# Altium PCB 20K Control Board V1.1.PcbDoc (part 13 of 24)
Units mm, origin at the board's own origin, x right, y up, seen from the top; angles counter-clockwise.
Board outline 132 x 260 mm, 4 copper layers (Top Layer, GND, VCC, Bottom Layer); 1384 components, 779 nets, 4515 pads, 1774 vias.
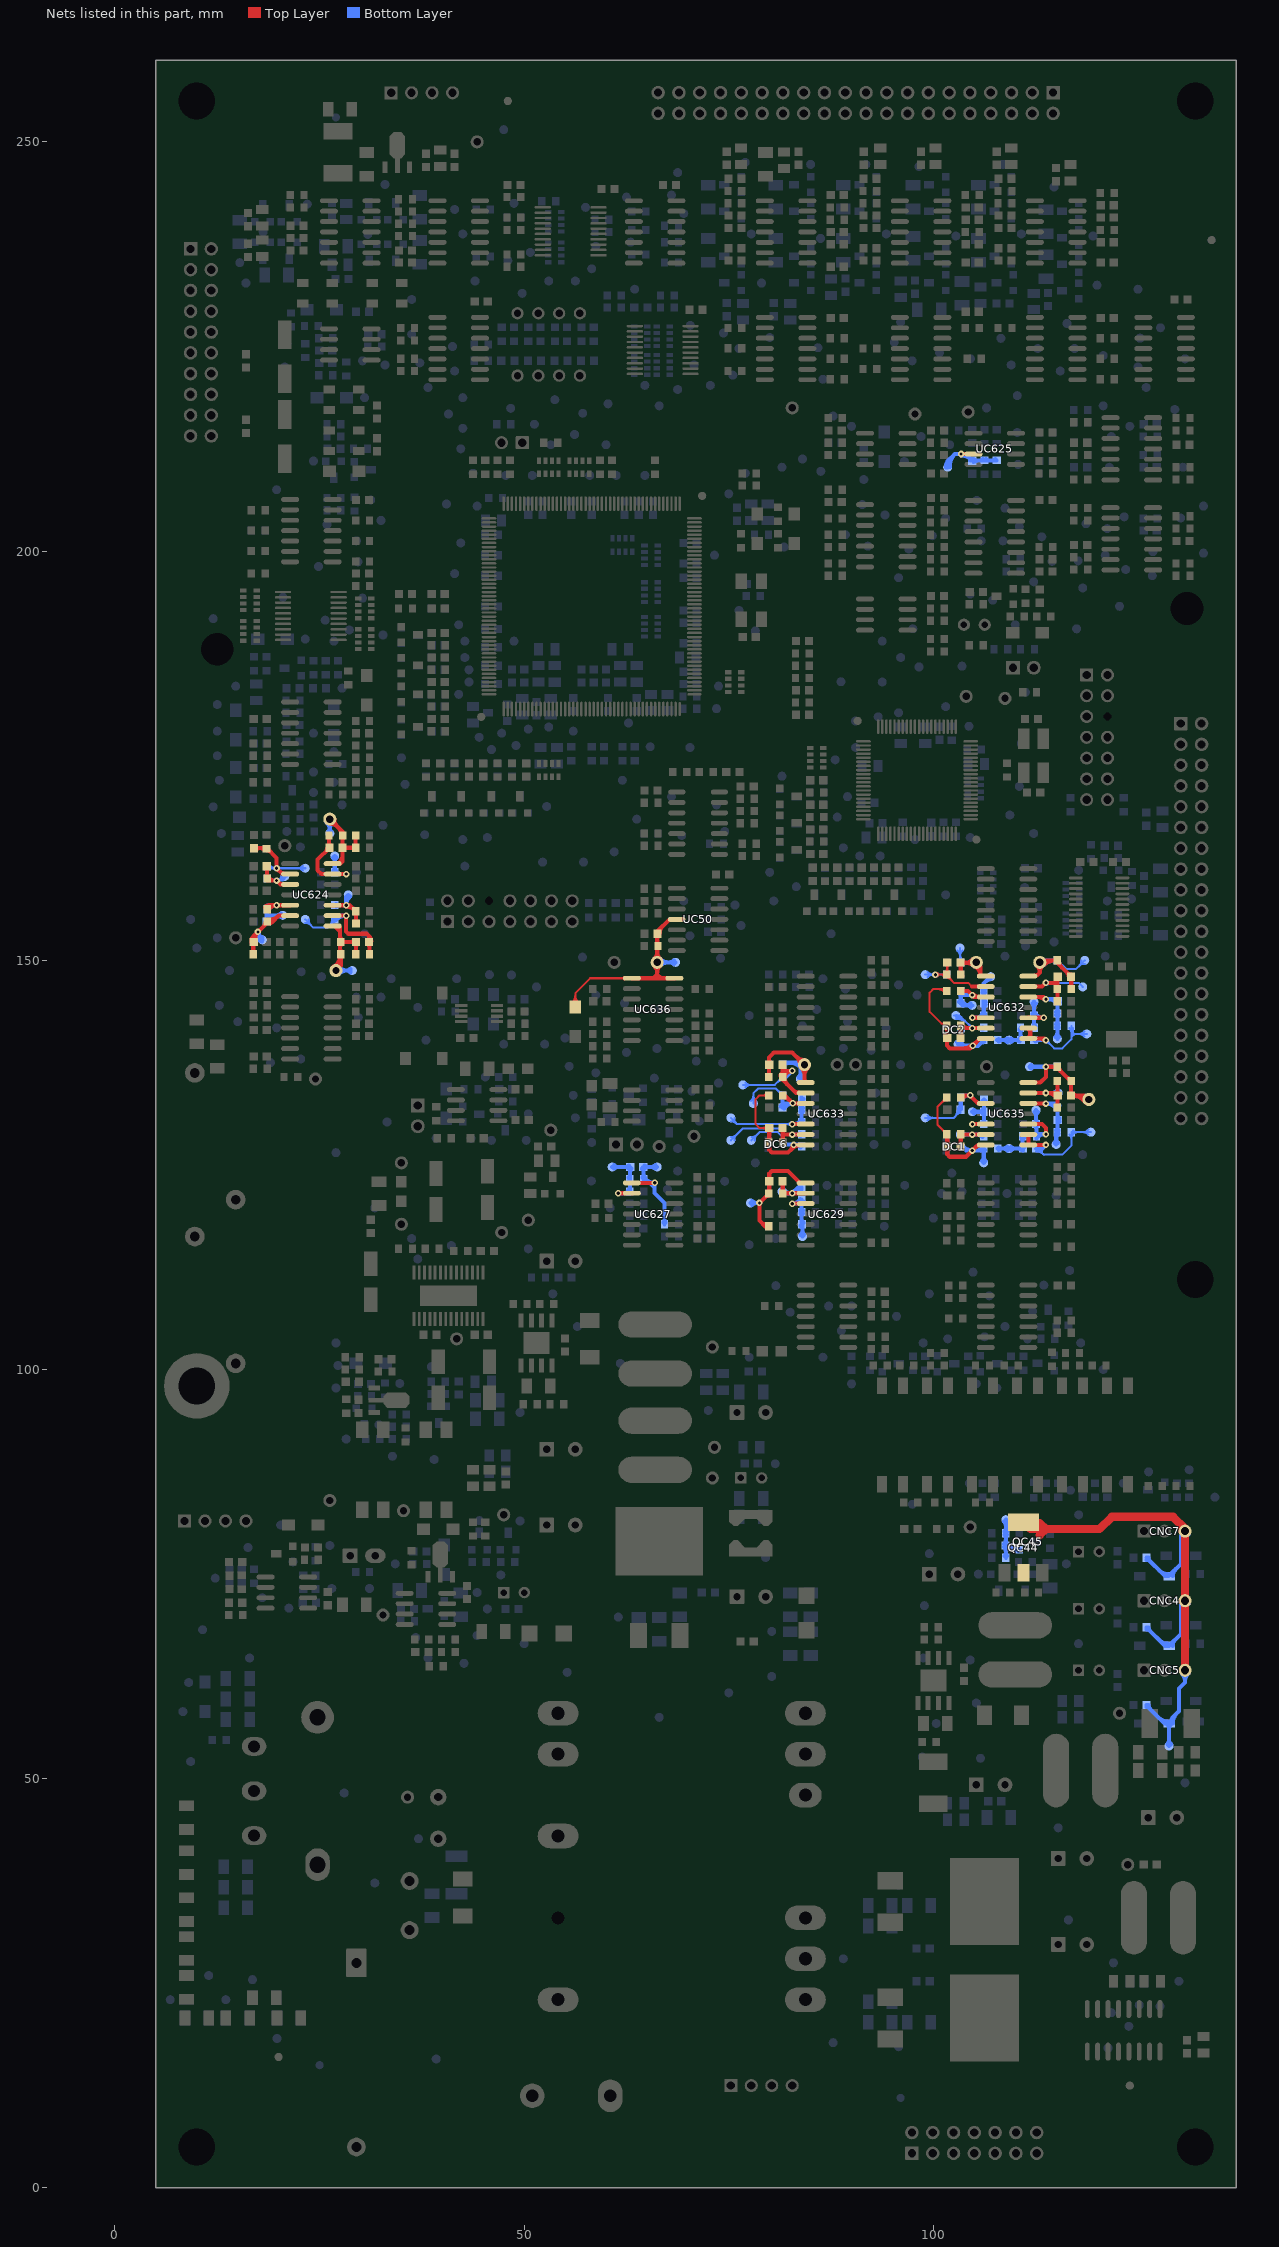
[diagram p15: the nets of this part, all layers, seen from the top]

## Via types
v1: diameter 0.8, hole 0.4, Top Layer to Bottom Layer, tented both sides, 1354 vias
v2: diameter 1.2, hole 0.7, Top Layer to Bottom Layer, 261 vias
v3: diameter 0.8, hole 0.4, Top Layer to Bottom Layer, 58 vias
v4: diameter 1.2, hole 0.7, Top Layer to Bottom Layer, tented top, 58 vias
v5: diameter 0.8, hole 0.4, Top Layer to Bottom Layer, tented top, 22 vias
v6: diameter 1.2, hole 0.7, Top Layer to Bottom Layer, tented both sides, 13 vias
v7: diameter 1.2, hole 0.7, Top Layer to Bottom Layer, tented bottom, 8 vias

## Nets (pads, with @x,y where several pads share a name; then routed paths per layer and width w, separated by ;. In a path a pad name is that pad's centre, name@x,y a point inside that pad or via, vN(x,y) a via of type N, cw(c..) or ccw(c..) an arc to the next point about the centre after c; other vN are vias at no path point) (continued)
NetCC4_1: CC4.1 pad.ICT@103.25,151.5 RC12.1 RC18.2 TP4.1 UC632.1 | length 24.1
  Top Layer w0.5: CC4.1@103.123,149.573 cw(c102.576,149.026) 103.35,149.026 ; RC12.1@103.209,148.441 ccw(c102.867,148.783) 103.35,148.783 ccw(c103.833,148.783) RC12.1@103.491,148.441 ; CC4.1@103.477,149.927 ccw(c104.024,150.474) 104.024,149.7 ; RC12.1@103.54,148.06 RC12.1@103.35,148.25 103.35,149.7 105.2,149.7 TP4.1@105.25,149.75 105.75,149.25 UC632.1@105.75,148.25 ; 103.801,149.7 ccw(c103.801,151.199) TP4.1@104.861,150.139 ; 104.043,149.7 cw(c104.043,148.543) TP4.1@104.861,149.361 ; TP4.1@105.037,149.243 cw(c104.585,148.169) UC632.1@105.75,148.169 ; TP4.1@105.231,149.704 cw(c104.901,148.922) 105.75,148.922 ; UC632.1@105.565,148.095 ccw(c105.117,148.543) 105.75,148.543
  Bottom Layer w0.25: pad.ICT@102.949,151.199 cw(c102.224,150.474) 103.25,150.474 cw(c104.276,150.474) pad.ICT@103.551,151.199 ; RC18.2@103.12,150.03 ccw(c102.807,150.343) 103.25,150.343 ; RC18.2@103.25,149.85 pad.ICT@103.25,151.5 ; 103.25,150.826 ccw(c104.376,150.826) RC18.2@103.58,150.03 ; RC18.2@103.35,149.75 TP4.1@105.25,149.75 ; RC18.2@103.58,149.52 cw(c104.135,148.965) 104.135,149.75 cw(c104.135,150.535) RC18.2@103.58,149.98 ; TP4.1@104.773,149.273 ccw(c103.62,148.12) 103.62,149.75 ccw(c103.62,151.38) TP4.1@104.773,150.227 ; TP4.1@104.949,149.449 ccw(c104.224,148.724) 104.224,149.75 ccw(c104.224,150.776) TP4.1@104.949,150.051
NetCC4_2: CC4.2 pad.ICT@99,148.25 RC12.2 RC13.2 UC632.2 | length 22.1
  Top Layer w0.25: v1(100.25,148.25) RC12.2@101.65,148.25 ; v1@100.444,148.056 cw(c100.914,147.586) 100.914,148.25 cw(c100.914,148.914) v1@100.444,148.444 ; RC12.2@101.42,148.02 ccw(c100.865,147.465) 100.865,148.25 ccw(c100.865,149.035) RC12.2@101.42,148.48 ; RC12.2@101.42,148.53 ccw(c100.745,149.205) 101.7,149.205 ; CC4.2@101.435,149.485 cw(c100.795,148.845) 101.7,148.845 cw(c102.605,148.845) CC4.2@101.965,149.485 ; RC12.2@101.65,147.875 cw(c101.65,147.332) 102.034,147.716 ; 101.7,148.964 ccw(c102.314,148.964) RC12.2@101.88,148.53 ; CC4.2@101.7,149.75 101.7,148.05 102.5,147.25 104.25,147.25 104.71,146.79 ; RC12.2@101.975,148.2 ccw(c103.001,148.2) 102.276,147.474
  Top Layer w0.5: 104.71,146.79 UC632.2@106.4,146.79
  Bottom Layer w0.25: pad.ICT@99,148.25 v1(100.25,148.25) RC13.2@101.65,148.25 ; pad.ICT@99.301,147.949 cw(c100.026,147.224) 100.026,148.25 cw(c100.026,149.276) pad.ICT@99.301,148.551 ; v1@100.056,148.056 ccw(c99.586,147.586) 99.586,148.25 ccw(c99.586,148.914) v1@100.056,148.444 ; v1@100.444,148.056 cw(c100.914,147.586) 100.914,148.25 cw(c100.914,148.914) v1@100.444,148.444 ; RC13.2@101.42,148.02 ccw(c100.865,147.465) 100.865,148.25 ccw(c100.865,149.035) RC13.2@101.42,148.48
NetCC5_1: CC5.1 pad.ICT@26.25,165.5 RC4.1 RC11.1 RC20.1 TP2.1 UC624.14 | length 25.5
  Top Layer w0.5: TP2.1@26.25,166.7 cw(c26.25,165.372) 27.189,166.311 cw(c28.128,167.25) TP2.1@26.8,167.25 ; TP2.1@26.25,167.25 27.85,165.65 RC20.1@27.85,165.25 ; UC624.14@26.6,161.81 27.56,161.81 27.8,162.05 CC5.1@27.8,163.75 ; 27.261,166.239 cw(c26.322,165.3) RC20.1@27.65,165.3 ; UC624.14@27.365,161.845 ccw(c26.314,162.896) 27.8,162.896 ; UC624.14@27.4,161.86 ccw(c27.4,162.367) 27.758,162.008 ; CC5.1@27.623,163.573 cw(c27.196,163.146) 27.8,163.146 cw(c28.404,163.146) 27.977,163.573 cw(c28.404,163.146) 28.404,163.75 cw(c28.404,164.354) 27.977,163.927 cw(c28.404,164.354) 27.8,164.354 cw(c27.196,164.354) CC5.1@27.623,163.927 ; 27.8,164.596 cw(c28.454,164.596) RC20.1@27.991,165.059 ; RC20.1@27.8,165.2 CC5.1@27.8,163.75 ; RC11.1@29.259,163.609 ccw(c28.917,163.267) 28.917,163.75 ccw(c28.917,164.233) RC11.1@29.259,163.891 ; RC11.1@29.259,163.941 ccw(c28.917,164.283) 29.4,164.283 ccw(c29.883,164.283) RC11.1@29.541,163.941 ; RC4.1@29.259,165.059 cw(c28.917,164.717) 29.4,164.717 cw(c29.883,164.717) RC4.1@29.541,165.059 ; RC4.1@29.4,165.25 RC11.1@29.4,163.75 CC5.1@27.8,163.75
  Bottom Layer w0.5: TP2.1@25.861,166.861 cw(c24.922,165.922) 26.25,165.922 cw(c27.578,165.922) TP2.1@26.639,166.861 ; pad.ICT@26.038,165.712 ccw(c25.526,166.224) 26.25,166.224 ccw(c26.974,166.224) pad.ICT@26.462,165.712 ; pad.ICT@26.25,165.5 TP2.1@26.25,167.25
NetCC5_2: CC5.2 pad.ICT@26.85,162.75 RC15.1 RC20.2 UC624.13 | length 16.7
  Top Layer w0.5: CC5.2@25.773,163.323 ccw(c25.346,163.75) CC5.2@25.95,163.75 ; CC5.2@25.773,163.323 cw(c26.2,162.896) CC5.2@26.2,163.5 ; RC20.2@26.009,165.059 cw(c25.667,164.717) 26.15,164.717 cw(c26.633,164.717) RC20.2@26.291,165.059 ; CC5.2@26.15,163.8 RC20.2@26.15,165.25 ; 26.15,164.474 ccw(c26.924,164.474) CC5.2@26.377,163.927 ; CC5.2@26.2,163.75 24.75,162.3 24.75,161 25.21,160.54 UC624.13@26.6,160.54 v1(28.25,160.54)
  Bottom Layer w0.5: pad.ICT@26.638,162.538 cw(c26.126,162.026) 26.85,162.026 cw(c27.574,162.026) pad.ICT@27.062,162.538 ; RC15.1@26.709,160.941 ccw(c26.367,161.283) 26.85,161.283 ccw(c27.333,161.283) RC15.1@26.991,160.941 ; RC15.1@26.85,160.75 pad.ICT@26.85,162.75 ; RC15.1@26.991,160.841 ccw(c27.719,161.569) 27.719,160.54 ; RC15.1@27.06,160.54 v1(28.25,160.54)
NetCC6_1: CC6.1 pad.ICT@66.25,124.75 RC8.2 RC21.2 UC627.1 | length 19.2
  Top Layer w0.5: UC627.1@63.15,122.81 v1(65.94,122.81)
  Bottom Layer w0.5: CC6.1@64.373,124.573 cw(c63.826,124.026) 64.6,124.026 ; RC21.2@64.459,123.441 ccw(c64.117,123.783) 64.6,123.783 ccw(c65.083,123.783) RC21.2@64.741,123.441 ; CC6.1@64.55,124.75 pad.ICT@66.25,124.75 ; CC6.1@64.6,124.7 RC21.2@64.6,123.25 65.04,122.81 v1(65.94,122.81) ; CC6.1@64.727,124.573 cw(c65.154,124.146) 65.154,124.75 cw(c65.154,125.354) CC6.1@64.727,124.927 ; RC21.2@64.748,123.335 ccw(c65.94,124.427) v1(65.94,122.81) ; 65.5,122.69 65.94,122.25 ; pad.ICT@66.038,124.538 ccw(c65.526,124.026) 65.526,124.75 ccw(c65.526,125.474) pad.ICT@66.038,124.962 ; RC8.2@67.009,117.941 ccw(c66.667,118.283) 67.15,118.283 ccw(c67.633,118.283) RC8.2@67.291,117.941 ; RC8.2@67.15,117.75 67.15,120.35 65.94,121.56 65.94,122.25 ; 65.94,122.25 v1(65.94,122.81)
NetCC6_2: CC6.2 pad.ICT@60.75,124.75 RC19.2 RC21.1 UC627.2 | length 13.6
  Top Layer w0.5: v1(61.5,121.54) UC627.2@63.15,121.54
  Bottom Layer w0.5: pad.ICT@60.75,124.75 CC6.2@62.95,124.75 RC19.2@62.95,121.8 ; pad.ICT@60.962,124.538 cw(c61.474,124.026) 61.474,124.75 cw(c61.474,125.474) pad.ICT@60.962,124.962 ; v1(61.5,121.54) RC19.2@62.91,121.54 ; 62.031,121.54 ccw(c62.031,122.569) RC19.2@62.759,121.841 ; RC19.2@62.759,121.941 ccw(c62.296,122.404) 62.95,122.404 ; RC21.1@62.759,123.059 cw(c62.296,122.596) 62.95,122.596 ; RC21.1@62.759,123.441 ccw(c62.296,123.904) 62.95,123.904 ; CC6.2@62.773,124.927 cw(c62.346,125.354) 62.346,124.75 cw(c62.346,124.146) 62.773,124.573 cw(c62.346,124.146) 62.95,124.146 cw(c63.554,124.146) CC6.2@63.127,124.573
NetCC7_2: CC7.2 pad.ICT@28.5,158 RC30.1 RC32.1 UC624.10 | length 13.3
  Top Layer w0.5: UC624.10@26.6,156.73 v1(28.25,156.73) 28.67,156.73 RC30.1@29.4,156 29.45,155.95 CC7.2@29.45,154.5 ; v1@28.25,156.58 cw(c28.25,155.204) RC30.1@29.223,156.177 ; v1@28.323,156.599 cw(c28.549,156.189) 28.88,156.52 ; RC30.1@28.973,156.427 ccw(c29.4,156.854) RC30.1@29.4,156.25 ; RC30.1@29.259,155.809 cw(c28.796,155.346) 29.45,155.346 ; CC7.2@29.273,154.677 ccw(c28.846,155.104) 29.45,155.104 ccw(c30.054,155.104) CC7.2@29.627,154.677
  Bottom Layer w0.5: RC32.1@26.85,156.75 v1@28.23,156.75 ; RC32.1@26.991,156.609 cw(c27.333,156.267) 27.333,156.75 cw(c27.333,157.233) RC32.1@26.991,156.891 ; 27.84,156.75 cw(c27.84,156.32) v1@28.144,156.624 ; v1@28.25,156.706 cw(c29.748,156.706) pad.ICT@28.708,157.784 ; v1(28.25,156.73) 28.25,157.75 pad.ICT@28.5,158
NetCC10_1: CC10.1 pad.ICT@99,130.75 RC17.2 RC25.1 UC635.3 | length 17.8
  Top Layer w0.5: RC17.2@103.491,133.159 cw(c104.316,132.334) v1@104.316,133.5 ; RC17.2@103.6,133.5 v1(104.5,133.5) 105.48,132.52 UC635.3@106.4,132.52 ; 105.31,132.69 ccw(c105.6,132.98) UC635.3@105.6,132.57
  Bottom Layer w0.25: pad.ICT@99,130.75 102.5,130.75 103.3,131.55 CC10.1@103.3,131.75 ; pad.ICT@99.301,130.449 cw(c100.026,129.724) 100.026,130.75 cw(c100.026,131.776) pad.ICT@99.301,131.051 ; 102.6,130.85 ccw(c101.806,131.644) CC10.1@102.926,131.723 ; 102.987,131.237 ccw(c102.529,131.695) CC10.1@103.175,131.741 ; CC10.1@103.001,131.251 cw(c103.3,130.953) CC10.1@103.3,131.375
  Bottom Layer w0.5: CC10.1@103.123,131.927 ccw(c102.576,132.474) 103.35,132.474 ; RC25.1@103.209,133.059 cw(c102.867,132.717) 103.35,132.717 cw(c103.833,132.717) RC25.1@103.491,133.059 ; CC10.1@103.35,131.8 103.35,133.15 RC25.1@103.5,133 ; RC25.1@103.35,133.25 103.6,133.5 v1(104.5,133.5) ; RC25.1@103.491,133.159 cw(c104.316,132.334) v1@104.316,133.5
NetCC11_1: CC11.1 DC1.3 pad.ICT@106.15,125.25 RC17.1 RC35.1 RC58.2 UC635.7 | length 27.6
  Top Layer w0.25: 101.01,129.39 ccw(c101.65,130.03) RC35.1@101.65,129.125 ; 101.01,132.61 cw(c101.65,131.97) RC17.1@101.65,132.875 ; 101.131,129.269 cw(c100.661,128.8) RC35.1@101.325,128.8 ; 101.131,132.731 ccw(c100.661,133.2) RC17.1@101.325,133.2 ; RC17.1@101.5,133.25 RC17.1@101.65,133.25 100.5,132.1 100.5,129.9 RC35.1@101.65,128.75
  Top Layer w0.5: RC35.1@101.509,128.559 cw(c101.046,128.096) 101.7,128.096 ; CC11.1@101.523,127.073 cw(c101.096,126.646) 101.7,126.646 cw(c102.304,126.646) CC11.1@101.877,127.073 ; CC11.1@101.523,127.427 ccw(c101.096,127.854) 101.7,127.854 ccw(c102.304,127.854) CC11.1@101.877,127.427 ; RC35.1@101.7,128.7 CC11.1@101.7,127.25 101.7,126.3 102,126 104,126 v1(104.75,126.75) 105.44,127.44 UC635.7@106.4,127.44 ; 105.241,127.241 cw(c105.6,126.883) UC635.7@105.6,127.39
  Bottom Layer w0.5: DC1.3@103.427,127.25 103.5,127.25 104,126.75 v1(104.75,126.75) ; DC1.3@103.616,127.282 ccw(c104.75,128.226) v1(104.75,126.75) ; 105.184,126.75 ccw(c105.184,127.916) RC58.2@106.009,127.091 ; pad.ICT@105.938,125.462 ccw(c105.426,125.974) 106.15,125.974 ccw(c106.874,125.974) pad.ICT@106.362,125.462 ; RC58.2@106.009,126.809 cw(c105.667,126.467) 106.15,126.467 cw(c106.633,126.467) RC58.2@106.291,126.809 ; pad.ICT@106.15,125.25 RC58.2@106.15,127 105.9,126.75 v1(104.75,126.75)
NetCC11_2: CC11.2 pad.ICT@103.29,128.71 RC34.1 RC35.2 UC635.6 | length 11.2
  Top Layer w0.5: CC11.2@103.123,127.427 ccw(c102.576,127.974) 103.35,127.974 ; RC35.2@103.209,128.559 cw(c102.867,128.217) 103.35,128.217 cw(c103.833,128.217) 103.491,128.559 cw(c103.857,128.193) 103.857,128.71 ; CC11.2@103.35,127.3 RC35.2@103.35,128.71 ; RC35.2@103.35,128.75 RC35.2@103.35,128.71 ; RC35.2@103.491,128.841 ccw(c103.809,129.159) 103.809,128.71 ; UC635.6@106.4,128.71 v1(104.75,128.71) RC35.2@103.35,128.71
  Bottom Layer w0.5: pad.ICT@103.29,128.71 v1(104.75,128.71) RC34.1@105.94,128.71 ; pad.ICT@103.502,128.498 cw(c104.014,127.986) 104.014,128.71 cw(c104.014,129.434) pad.ICT@103.502,128.922 ; 105.281,128.71 cw(c105.281,127.681) RC34.1@106.009,128.409
NetCC12_1: CC12.1 pad.ICT@104.75,131.5 RC23.1 RC26.1 UC635.5 | length 11.4
  Top Layer w0.5: v1(104.77,129.98) UC635.5@106.4,129.98
  Bottom Layer w0.5: pad.ICT@104.75,131.5 RC26.1@105.9,131.5 ; v1(104.77,129.98) 105.88,129.98 RC23.1@105.9,130 ; pad.ICT@104.962,131.288 cw(c105.474,130.776) 105.474,131.5 cw(c105.474,132.224) pad.ICT@104.962,131.712 ; 105.619,129.98 ccw(c105.619,130.531) RC23.1@106.009,130.141 ; RC23.1@106.009,130.191 ccw(c105.546,130.654) 106.2,130.654 ; RC26.1@106.009,131.309 cw(c105.546,130.846) 106.2,130.846 ; RC26.1@106.009,131.359 ccw(c105.667,131.017) 105.667,131.5 ccw(c105.667,131.983) RC26.1@106.009,131.641 ; RC26.1@106.009,131.691 ccw(c105.546,132.154) 106.2,132.154 ; CC12.1@106.023,132.823 cw(c105.596,132.396) 106.2,132.396 cw(c106.804,132.396) CC12.1@106.377,132.823 ; RC23.1@106.2,130.3 CC12.1@106.2,133
NetCC13_1: CC13.1 DC2.3 pad.ICT@103,139.75 RC22.1 RC37.1 RC62.2 UC632.7 | length 30.6
  Top Layer w0.25: 100.383,146.5 cw(c100.383,145.033) RC22.1@101.42,146.07 ; 100.986,146.5 cw(c100.986,145.636) RC22.1@101.597,146.247 ; RC37.1@101.332,141.982 ccw(c101,141.91) 101,142.25 ; RC37.1@101.4,142.25 101,142.25 ; RC22.1@101.65,146.25 101.4,146.5 100,146.5 99.55,146.05 99.55,143.7 101,142.25
  Top Layer w0.5: RC37.1@101.509,141.809 cw(c101.167,141.467) 101.65,141.467 cw(c102.133,141.467) RC37.1@101.791,141.809 ; 101.65,139.776 cw(c102.424,139.776) CC13.1@101.877,140.323 ; 101.65,141.224 ccw(c102.424,141.224) CC13.1@101.877,140.677 ; RC37.1@101.65,142 101.65,139.6 102,139.25 104.5,139.25 v1(104.81,139.56) 105.69,140.44 UC632.7@106.4,140.44 ; 103.699,139.25 ccw(c103.699,140.671) v1@104.704,139.666
  Bottom Layer w0.5: pad.ICT@103.212,139.962 ccw(c104.183,140.933) 104.183,139.56 ; DC2.3@103.427,141.5 103.427,140.75 ; 103.75,139.56 103.427,139.883 103.427,140.75 ; RC62.2@105.723,139.823 cw(c106.15,139.396) RC62.2@106.15,140 ; RC62.2@106.15,140.25 105.46,139.56 103.19,139.56 pad.ICT@103,139.75 103.427,140.177 103.427,140.75 ; 103.427,140.75 cw(c102.676,140.75) 102.908,140.035 ccw(c102.676,140.75) 103.427,140.75
NetCC13_2: CC13.2 pad.ICT@102.75,143.25 RC37.2 RC42.1 UC632.6 | length 16.6
  Top Layer w0.5: CC13.2@103.123,140.677 ccw(c102.576,141.224) 103.35,141.224 ; RC37.2@103.209,141.809 cw(c102.867,141.467) 103.35,141.467 cw(c103.833,141.467) RC37.2@103.491,141.809 ; CC13.2@103.35,140.55 RC37.2@103.35,142 ; RC37.2@103.39,141.71 v1(104.75,141.71) UC632.6@106.4,141.71 ; RC37.2@103.491,142.091 ccw(c104.412,143.012) v1@104.412,141.71
  Bottom Layer w0.25: pad.ICT@102.5,143.25 103.21,143.25 v1(104.75,141.71) ; pad.ICT@102.75,142.825 cw(c102.75,140.688) 104.261,142.199 ; pad.ICT@102.75,143.075 cw(c102.75,141.542) 103.834,142.626 ; pad.ICT@102.75,143.325 cw(c102.75,142.396) 103.407,143.053 ; v1@104.475,141.71 ccw(c103.811,141.71) 104.281,142.179 ccw(c104.75,142.649) v1@104.75,141.985
  Bottom Layer w0.5: v1(104.75,141.71) RC42.1@106.11,141.71 ; 105.643,141.71 cw(c105.643,141.193) RC42.1@106.009,141.559 ; 105.691,141.71 ccw(c105.691,142.159) RC42.1@106.009,141.841 ; RC42.1@105.86,141.71 RC42.1@105.9,141.75
NetCC14_1: CC14.1 pad.ICT@104.75,144.5 RC22.2 RC29.1 UC632.3 | length 14.9
  Top Layer w0.5: RC22.2@103.3,146.25 104.25,146.25 104.98,145.52 UC632.3@106.4,145.52 ; RC22.2@103.491,146.109 cw(c103.833,145.767) 103.833,146.25 cw(c103.833,146.733) RC22.2@103.491,146.391 ; v1@104.856,145.856 ccw(c105.667,146.667) UC632.3@105.667,145.52
  Bottom Layer w0.5: RC29.1@103.121,146.006 ccw(c103.673,146.473) RC29.1@103.673,145.75 ; CC14.1@103.123,144.927 ccw(c102.576,145.474) 103.35,145.474 ; RC29.1@103.209,146.059 cw(c102.867,145.717) 103.35,145.717 cw(c103.833,145.717) RC29.1@103.491,146.059 ; CC14.1@103.35,144.75 RC29.1@103.35,146.25 ; RC29.1@103.35,145.75 v1(104.75,145.75) cw(c104.75,147.383) RC29.1@103.503,146.329 ; CC14.1@103.477,144.927 ccw(c104.507,145.957) pad.ICT@104.507,144.5 ; CC14.1@103.55,144.5 pad.ICT@104.75,144.5 ; pad.ICT@104.538,144.288 ccw(c104.026,143.776) 104.026,144.5 ccw(c104.026,145.224) pad.ICT@104.538,144.712
NetCC22_2: CC22.2 CC25.2 CC28.2 CNC4.3 CNC5.3 CNC7.3 DC3.1 DC4.1 DC5.1 pad.ICT@128.8,54 QC44.2 QC44.4 | length 103.5
  Top Layer w1: QC44.4@111.6,80.75 111.85,80.5 113.75,80.5 ; QC44.4@112.134,80.865 cw(c112.741,79.916) 113.537,80.712 ; QC44.4@112.375,81.518 ccw(c113.75,81.937) 113.75,80.5 ; 113,79.75 113.75,80.5 ; 113,81.25 113.75,80.5 ; 130.026,81.274 cw(c129.001,80.25) CNC7.3@130.45,80.25 ; CNC5.3@130.75,63.25 130.75,80.55 129.3,82 121.8,82 120.3,80.5 113.75,80.5
  Bottom Layer w0.5: CC28.2@126.05,58.75 cw(c126.05,58.267) CC28.2@126.391,58.609 ; CC28.2@126.05,59 126.05,58.95 DC5.1@128.25,56.75 ; CC25.2@126.05,68.25 cw(c126.05,67.646) CC25.2@126.477,68.073 ; CC25.2@126.05,68.5 128.3,66.25 DC3.1@128.8,66.25 130.25,67.7 130.25,71.25 CNC4.3@130.75,71.75 ; CC22.2@126.05,76.75 cw(c126.05,76.146) 126.477,76.573 cw(c126.904,77) CC22.2@126.3,77 ; CC22.2@126.05,77 128.3,74.75 128.75,74.75 130.25,76.25 130.25,79.75 CNC7.3@130.75,80.25 ; CC28.2@126.3,59 ccw(c127.024,59) 126.512,58.488 ; CC25.2@126.3,68.5 ccw(c126.904,68.5) CC25.2@126.477,68.073 ; 127.576,57.424 ccw(c128.6,58.449) DC5.1@128.6,57 ; 127.661,66.889 ccw(c128.6,67.828) DC3.1@128.6,66.5 ; 127.661,75.389 ccw(c128.6,76.328) DC4.1@128.6,75 ; pad.ICT@128.588,54.212 ccw(c128.076,54.724) 128.8,54.724 ccw(c129.524,54.724) pad.ICT@129.012,54.212 ; DC5.1@128.623,56.573 cw(c128.196,56.146) 128.8,56.146 cw(c129.404,56.146) DC5.1@128.977,56.573 ; pad.ICT@128.8,54 DC5.1@128.8,56.75 ; DC5.1@128.904,56.981 ccw(c128.688,57.5) 129.25,57.5 ; DC5.1@129.202,56.897 cw(c129.579,57.17) 129.25,57.5 ; DC5.1@129.25,56.75 cw(c131.061,56.75) 129.78,58.03 ; DC5.1@129.25,56.897 129.25,57.5 ; DC3.1@129.25,66.25 cw(c130.336,66.25) 129.568,67.018 ; DC4.1@129.25,74.75 cw(c130.457,74.75) 129.604,75.604 ; 130.25,69.215 cw(c133.285,69.215) CNC4.3@131.139,71.361 ; 130.25,70.422 cw(c132.078,70.422) CNC4.3@130.785,71.715 ; CNC5.3@130.361,62.861 cw(c129.422,61.922) 130.75,61.922 cw(c132.078,61.922) CNC5.3@131.139,62.861 ; CNC5.3@130.75,63.25 130.75,61.75 130,61 130,58.25 129.25,57.5 ; 130.25,77.715 cw(c133.285,77.715) 131.139,79.861 ccw(c133.285,77.715) 130.25,77.715 ; 130.25,78.922 cw(c132.078,78.922) 130.785,80.215 ccw(c132.078,78.922) 130.25,78.922
NetCC23_1: CC23.1 pad.ICT@107,148 RC24.1 RC31.1 UC632.5 | length 13.9
  Top Layer w0.5: v1(104.77,142.98) UC632.5@106.4,142.98
  Bottom Layer w0.5: v1(104.77,142.98) RC24.1@105.93,142.98 ; v1@105.136,142.98 ccw(c105.136,144.214) RC24.1@106.009,143.341 ; 105.68,142.98 105.95,143.25 RC24.1@105.95,143.45 ; RC24.1@106.009,143.441 ccw(c105.667,143.783) 106.15,143.783 ccw(c106.633,143.783) RC24.1@106.291,143.441 ; RC31.1@106.009,146.059 cw(c105.667,145.717) 106.15,145.717 cw(c106.633,145.717) RC31.1@106.291,146.059 ; RC31.1@106.009,146.441 ccw(c105.667,146.783) 106.15,146.783 ccw(c106.633,146.783) RC31.1@106.291,146.441 ; RC24.1@106.15,143.45 106.15,144.25 RC31.1@106.15,146.25 106.15,147.15 pad.ICT@107,148 ; 106.15,144.026 cw(c106.924,144.026) CC23.1@106.377,144.573 ; 106.15,145.474 ccw(c106.924,145.474) CC23.1@106.377,144.927 ; pad.ICT@106.7,148 cw(c105.976,148) 106.488,147.488 cw(c107,146.976) pad.ICT@107,147.7
NetCC24_1: CC24.1 pad.ICT@111.75,137 RC45.2 RC50.2 RC55.2 TP8.1 UC635.14 | length 24.5
  Top Layer w0.5: UC635.14@111.6,135.06 113.06,135.06 113.75,135.75 v1(113.75,137) 115,137 RC50.2@115.15,137 ; RC50.2@115.009,136.859 ccw(c114.667,136.517) 114.667,137 ccw(c114.667,137.483) RC50.2@115.009,137.141 ; RC50.2@115.15,136.85 116.8,135.2 CC24.1@116.8,133.5 ; RC50.2@115.35,136.95 ccw(c116.074,136.95) 115.562,136.438 ; 116.253,135.747 ccw(c116.85,136.345) RC45.2@116.85,135.5 ; CC24.1@116.623,133.677 ccw(c116.196,134.104) 116.8,134.104 ccw(c117.404,134.104) 116.977,133.677 ccw(c117.404,134.104) 117.404,133.5 ccw(c117.404,132.896) CC24.1@116.977,133.323 ; 116.8,134.596 cw(c117.454,134.596) RC45.2@116.991,135.059 ; 117.848,133.5 cw(c117.848,132.068) TP8.1@118.961,132.969 ; TP8.1@118.572,132.654 ccw(c116.8,131.22) CC24.1@116.8,133.5 ; TP8.1@119,133 118.5,133.5 CC24.1@116.8,133.5
  Bottom Layer w0.5: pad.ICT@111.75,137 v1(113.75,137) RC55.2@115.15,137 ; pad.ICT@111.962,136.788 cw(c112.474,136.276) 112.474,137 cw(c112.474,137.724) pad.ICT@111.962,137.212 ; RC55.2@115.009,136.859 ccw(c114.667,136.517) 114.667,137 ccw(c114.667,137.483) RC55.2@115.009,137.141
NetCC24_2: CC24.2 pad.ICT@115.25,133.79 RC38.2 RC45.1 UC635.13 | length 13.9
  Top Layer w0.5: UC635.13@111.6,133.79 CC24.2@114.94,133.79 ; v1@113.896,133.79 cw(c113.896,132.196) CC24.2@115.023,133.323 ; RC38.2@115.009,132.191 ccw(c114.667,132.533) 115.15,132.533 ccw(c115.633,132.533) RC38.2@115.291,132.191 ; RC45.1@115.009,135.059 cw(c114.667,134.717) 115.15,134.717 cw(c115.633,134.717) RC45.1@115.291,135.059 ; RC38.2@115.15,131.75 RC38.2@115.15,132 RC45.1@115.15,135.25 RC45.1@115.15,135.45 ; 115.15,132.776 cw(c115.924,132.776) CC24.2@115.377,133.323 ; 115.15,134.224 ccw(c115.924,134.224) CC24.2@115.377,133.677
  Bottom Layer w0.5: v1(113.75,133.79) pad.ICT@115.46,133.79 ; pad.ICT@115.038,133.578 ccw(c114.526,133.066) 114.526,133.79 ccw(c114.526,134.514) pad.ICT@115.038,134.002
NetCC26_1: CC26.1 pad.ICT@118.25,146.75 RC41.2 RC44.1 UC632.13 | length 15.3
  Top Layer w0.5: UC632.13@111.6,146.79 113.29,146.79 v1(113.75,147.25) 115.15,147.25 ; RC41.2@115.009,145.191 ccw(c114.667,145.533) 115.15,145.533 ccw(c115.633,145.533) RC41.2@115.291,145.191 ; RC44.1@115.009,146.309 cw(c114.667,145.967) 115.15,145.967 cw(c115.633,145.967) RC44.1@115.291,146.309 ; RC44.1@115.009,146.691 ccw(c114.667,147.033) 115.15,147.033 ccw(c115.633,147.033) RC44.1@115.291,146.691 ; RC41.2@115.15,145 115.15,147.25 ; 115.15,147.276 cw(c115.924,147.276) CC26.1@115.377,147.823 ; CC26.1@115.15,147.95 115.15,147.25
  Bottom Layer w0.25: v1(113.75,147.25) 117.75,147.25 pad.ICT@118.25,146.75 ; v1@113.944,147.056 cw(c114.414,146.586) 114.414,147.25 cw(c114.414,147.914) v1@113.944,147.444
NetCC26_2: CC26.2 pad.ICT@118.5,150 RC44.2 RC52.2 RC56.2 TP9.1 UC632.14 | length 29.5
  Top Layer w0.5: UC632.14@111.6,148.06 112.56,148.06 113,148.5 ; UC632.14@112.4,148.11 ccw(c112.4,148.617) 112.758,148.258 ; TP9.1@112.628,149.344 cw(c111.855,148.5) 113,148.5 ; TP9.1@113.372,149.344 ccw(c114.145,148.5) 113,148.5 ; TP9.1@113.389,149.361 cw(c114.931,147.819) RC52.2@114.931,150 ; RC52.2@115,149.85 RC52.2@115.15,150 ; RC52.2@115.009,149.859 ccw(c114.667,149.517) 114.667,150 ccw(c114.667,150.483) RC52.2@115.009,150.141 ; RC52.2@115.35,149.95 ccw(c116.469,149.95) 115.678,149.159 ; CC26.2@116.347,148.489 cw(c115.859,148) CC26.2@116.55,148 ; CC26.2@116.435,148.401 ccw(c116.8,148.766) CC26.2@116.8,148.25 ; CC26.2@116.623,147.823 cw(c116.076,147.276) 116.85,147.276 ; RC44.2@116.709,146.691 ccw(c116.367,147.033) 116.85,147.033 ccw(c117.333,147.033) RC44.2@116.991,146.691 ; RC44.2@116.85,146.5 116.85,147.986 115.15,149.686 RC52.2@115.15,150 ; 113,148.5 TP9.1@113,149.75 113.25,150 RC52.2@115.15,150
  Bottom Layer w0.25: RC56.2@115.15,149.625 cw(c115.15,148.72) 115.79,149.36 ; RC56.2@115.15,150 116.2,148.95 117.45,148.95 pad.ICT@118.5,150 ; RC56.2@115.475,149.95 ccw(c116.139,149.95) 115.669,149.481 ; pad.ICT@118.075,150 cw(c117.049,150) 117.774,149.274 cw(c118.5,148.549) pad.ICT@118.5,149.575
  Bottom Layer w0.5: TP9.1@113,149.75 113.25,150 RC56.2@115.15,150 RC56.2@115,149.85 ; TP9.1@113.389,149.361 cw(c114.931,147.819) RC56.2@114.931,150 ; RC56.2@115.009,149.859 ccw(c114.667,149.517) 114.667,150 ccw(c114.667,150.483) RC56.2@115.009,150.141
NetCC27_1: CC27.1 pad.ICT@29,148.75 RC33.1 RC39.1 RC48.1 TP5.1 UC624.8 | length 25
  Top Layer w0.5: UC624.8@26.6,154.19 27.31,154.19 27.5,154 27.5,153.5 ; TP5.1@26.723,149.225 ccw(c25.836,150.75) RC39.1@27.6,150.75 ; UC624.8@26.81,154.19 27.5,153.5 ; TP5.1@26.975,148.793 ccw(c26.342,149.88) 27.6,149.88 ; TP5.1@27,148.75 27.6,149.35 RC39.1@27.6,150.75 ; UC624.8@27.365,154.155 cw(c27.038,153.828) 27.5,153.828 ; RC39.1@27.459,150.559 cw(c27.117,150.217) 27.6,150.217 cw(c28.083,150.217) RC39.1@27.741,150.559 ; RC39.1@27.5,150.85 27.5,153.5 ; 27.5,151.476 cw(c28.324,151.476) RC33.1@27.741,152.059 ; 27.5,151.524 ccw(c28.324,151.524) RC39.1@27.741,150.941 ; 27.5,153.024 ccw(c28.324,153.024) RC33.1@27.741,152.441 ; RC39.1@27.6,150.85 RC39.1@27.6,150.75 ; RC33.1@27.741,152.109 cw(c28.083,151.767) 28.083,152.25 cw(c28.083,152.733) RC33.1@27.741,152.391 ; RC33.1@27.85,152.35 27.85,152.25 CC27.1@29.45,152.25 RC48.1@29.45,150.8 ; RC48.1@29.259,150.941 ccw(c28.796,151.404) 29.45,151.404 ; CC27.1@29.273,152.427 cw(c28.846,152.854) 28.846,152.25 cw(c28.846,151.646) 29.273,152.073 cw(c28.846,151.646) 29.45,151.646 cw(c30.054,151.646) CC27.1@29.627,152.073
  Bottom Layer w0.5: TP5.1@27,148.75 pad.ICT@28.75,148.75 ; TP5.1@27.389,148.361 cw(c28.328,147.422) 28.328,148.75 cw(c28.328,150.078) TP5.1@27.389,149.139 ; pad.ICT@28.788,148.538 ccw(c28.276,148.026) 28.276,148.75 ccw(c28.276,149.474) pad.ICT@28.788,148.962
NetCC27_2: CC27.2 pad.ICT@23.25,155 RC46.1 RC48.2 UC624.9 | length 22.4
  Top Layer w0.5: UC624.9@26.6,155.46 v1(28.25,155.46) 28.25,153.5 28.5,153.25 30.75,153.25 31.1,152.9 ; CC27.2@30.873,152.073 cw(c30.326,151.526) 31.1,151.526 ; CC27.2@30.888,152.44 ccw(c30.496,152.9) 31.1,152.9 ; RC48.2@30.959,150.941 ccw(c30.617,151.283) 31.1,151.283 ccw(c31.583,151.283) RC48.2@31.241,150.941 ; 31.071,152.929 cw(c30.496,152.353) CC27.2@31.296,152.204 ; RC48.2@31.1,150.75 31.1,152.9
  Bottom Layer w0.25: pad.ICT@23.25,154.575 cw(c23.25,153.549) 23.976,154.274 cw(c24.701,155) pad.ICT@23.675,155 ; pad.ICT@23.25,155 24.25,154 26,154 26.85,154.85 RC46.1@26.85,155 ; 26.224,154.224 ccw(c25.499,154.95) RC46.1@26.525,154.95 ; 26.466,154.466 cw(c26.85,154.082) RC46.1@26.85,154.625
  Bottom Layer w0.5: RC46.1@26.63,155.254 cw(c27.102,154.815) RC46.1@27.102,155.46 ; RC46.1@26.85,155 27.31,155.46 v1(28.25,155.46) ccw(c28.25,153.749) RC46.1@26.996,154.914
NetCC29_2: CC29.2 pad.ICT@108.85,81.65 QC45.1 RC78.1 RC89.2 | length 14.3
  Bottom Layer w0.5: CC29.2@108.615,78.331 ccw(c109.367,79.017) 109.367,78 ; CC29.2@108.623,78.323 cw(c108.076,77.776) 108.85,77.776 ; CC29.2@108.623,78.677 ccw(c108.076,79.224) 108.85,79.224 ; pad.ICT@108.638,81.438 cw(c108.126,80.926) 108.85,80.926 cw(c109.574,80.926) pad.ICT@109.062,81.438 ; RC89.2@108.709,77.191 ccw(c108.367,77.533) 108.85,77.533 ccw(c109.333,77.533) RC89.2@108.991,77.191 ; RC78.1@108.709,79.809 cw(c108.367,79.467) 108.85,79.467 cw(c109.333,79.467) RC78.1@108.991,79.809 ; RC78.1@108.709,80.191 ccw(c108.367,80.533) 108.85,80.533 ccw(c109.333,80.533) RC78.1@108.991,80.191 ; RC89.2@108.85,77 108.85,78 ; pad.ICT@108.85,81.65 RC78.1@108.85,80 108.85,78 ; CC29.2@108.985,78.669 ccw(c110.5,80.051) QC45.1@110.5,78 108.85,78 ; QC45.1@110.353,77.853 ccw(c110,77.5) 110,78 ccw(c110,78.5) QC45.1@110.353,78.147
NetCC31_1: CC31.1 pad.ICT@20.5,155.5 RC54.1 RC57.1 UC624.5 | length 19.1
  Top Layer w0.5: RC57.1@18.347,156.461 cw(c18.837,156.148) RC57.1@18.837,156.73 ; RC57.1@18.6,156.25 19.08,156.73 v1(19.75,156.73) ; RC57.1@18.6,156.5 ccw(c18.6,157.104) RC57.1@19.027,156.677 ; RC57.1@18.769,156.192 cw(c19.75,155.565) v1(19.75,156.73) ; UC624.5@21.4,156.73 v1(19.75,156.73)
  Bottom Layer w0.5: CC31.1@18.331,154.871 cw(c19.4,154.278) 19.4,155.5 ; RC54.1@18.347,156.461 cw(c18.837,156.148) RC54.1@18.837,156.73 ; CC31.1@18.55,154.75 18.55,155.5 ; 18.55,155.596 cw(c19.204,155.596) RC54.1@18.741,156.059 ; CC31.1@18.768,154.629 cw(c20.25,153.805) 20.25,155.5 18.55,155.5 ; RC54.1@18.769,156.192 cw(c19.75,155.565) v1(19.75,156.73) 19.08,156.73 RC54.1@18.6,156.25 18.55,156.2 18.55,155.5 ; 19.775,155.5 ccw(c19.775,156.225) pad.ICT@20.288,155.712 ; 19.776,155.5 cw(c19.776,154.776) pad.ICT@20.288,155.288 ; CC31.1@18.373,154.927 ccw(c17.946,155.354) 18.55,155.354 ; CC31.1@18.373,154.927 ccw(c17.946,155.354) 18.55,155.354 ; CC31.1@18.373,154.927 ccw(c17.946,155.354) 18.55,155.354 ; 18.55,155.354 ccw(c19.154,155.354) CC31.1@18.727,154.927 ; 18.55,155.354 ccw(c19.154,155.354) CC31.1@18.727,154.927 ; 18.55,155.354 ccw(c19.154,155.354) CC31.1@18.727,154.927
NetCC32_1: CC32.1 pad.ICT@119.25,129 RC51.1 UC635.8 UC635.9 | length 23.1
  Top Layer w0.5: UC635.9@111.6,128.71 UC635.8@111.6,127.44 v1(113.75,127.44)
  Bottom Layer w0.25: CC32.1@112.55,126.625 cw(c112.55,125.237) 113.532,126.218 ; CC32.1@112.55,126.875 cw(c112.55,126.09) 113.105,126.645 ; CC32.1@112.75,127 113.5,126.25 115.75,126.25 116.85,127.35 RC51.1@116.85,129 pad.ICT@119.25,129 ; CC32.1@112.925,127 ccw(c113.347,127) CC32.1@113.049,126.701 ; 113.25,126.5 113.25,126.94 113.31,127 ; RC51.1@116.62,128.72 cw(c116.065,128.165) 116.85,128.165 cw(c117.635,128.165) RC51.1@117.08,128.72 ; RC51.1@117.08,128.77 cw(c117.635,128.215) 117.635,129 cw(c117.635,129.785) RC51.1@117.08,129.23 ; pad.ICT@118.949,128.699 ccw(c118.224,127.974) 118.224,129 ccw(c118.224,130.026) pad.ICT@118.949,129.301
  Bottom Layer w0.5: CC32.1@112.727,126.823 cw(c113.154,126.396) 113.154,127 cw(c113.154,127.604) CC32.1@112.727,127.177 ; CC32.1@112.75,127 CC32.1@112.55,127 ; v1@113.5,127.19 v1(113.75,127.44) 113.31,127 CC32.1@112.55,127 ; v1@113.631,127.532 cw(c112.55,128.365) CC32.1@112.55,127
NetCC32_2: CC32.2 pad.ICT@109.25,127 RC58.1 RC59.2 | length 10
  Bottom Layer w0.5: RC58.1@107.85,127 CC32.2@110.95,127 ; RC58.1@107.991,126.859 cw(c108.333,126.517) 108.333,127 cw(c108.333,127.483) RC58.1@107.991,127.141 ; pad.ICT@109.038,126.788 ccw(c108.526,126.276) 108.526,127 ccw(c108.526,127.724) pad.ICT@109.038,127.212 ; pad.ICT@109.462,126.788 cw(c109.974,126.276) 109.974,127 cw(c109.974,127.724) pad.ICT@109.462,127.212 ; RC59.2@110.759,128.309 cw(c110.417,127.967) 110.9,127.967 cw(c111.383,127.967) RC59.2@111.041,128.309 ; CC32.2@110.773,126.823 ccw(c110.346,126.396) 110.346,127 ccw(c110.346,127.604) CC32.2@110.773,127.177 ; 110.9,127.724 ccw(c111.674,127.724) CC32.2@111.127,127.177 ; RC59.2@110.9,128.25 110.9,126.8 CC32.2@110.95,126.75
NetCC33_1: CC33.1 pad.ICT@118.75,141 RC53.1 UC632.8 UC632.9 | length 21
  Top Layer w0.5: UC632.8@111.565,140.475 ccw(c110.876,141.164) 111.85,141.164 ; UC632.9@111.565,141.675 cw(c110.876,140.986) 111.85,140.986 ; UC632.9@111.85,141.71 111.85,140.44 113.56,140.44 v1(113.75,140.25) ; 112.929,140.44 cw(c112.929,139.429) v1@113.644,140.144
  Bottom Layer w0.25: v1@113.75,139.975 cw(c113.75,139.311) 114.219,139.781 cw(c114.689,140.25) v1@114.025,140.25 ; v1(113.75,140.25) 114.75,139.25 115.75,139.25 116.85,140.35 116.85,141 ; RC53.1@116.62,141.72 cw(c116.065,141.165) 116.85,141.165 cw(c117.635,141.165) 117.08,141.72 117.08,141.17 117.25,141 ; 116.85,140.6 117.25,141 ; RC53.1@116.85,142 116.85,141 ; pad.ICT@118.449,140.699 ccw(c117.724,139.974) 117.724,141 ccw(c117.724,142.026) pad.ICT@118.449,141.3 ; pad.ICT@118.75,141 117.25,141 ; 116.85,141 117.25,141
  Bottom Layer w0.5: CC33.1@112.477,140.073 cw(c112.904,139.646) 112.904,140.25 cw(c112.904,140.854) CC33.1@112.477,140.427 ; CC33.1@112.49,140.44 CC33.1@112.3,140.25 v1(113.75,140.25)
NetCC33_2: CC33.2 pad.ICT@109.25,140.25 RC62.1 RC63.2 | length 9.8
  Bottom Layer w0.5: RC62.1@107.75,140.25 110.65,140.25 RC63.2@110.65,141.75 RC63.2@110.7,141.7 ; RC62.1@107.991,140.109 cw(c108.333,139.767) 108.333,140.25 cw(c108.333,140.733) RC62.1@107.991,140.391 ; pad.ICT@109.038,140.038 ccw(c108.526,139.526) 108.526,140.25 ccw(c108.526,140.974) pad.ICT@109.038,140.462 ; pad.ICT@109.462,140.038 cw(c109.974,139.526) 109.974,140.25 cw(c109.974,140.974) pad.ICT@109.462,140.462 ; RC63.2@110.509,141.559 cw(c110.167,141.217) 110.65,141.217 cw(c111.133,141.217) RC63.2@110.791,141.559 ; CC33.2@110.523,140.073 ccw(c110.096,139.646) 110.096,140.25 ccw(c110.096,140.854) CC33.2@110.523,140.427 ; 110.65,140.974 ccw(c111.424,140.974) CC33.2@110.877,140.427
NetCC34_1: CC34.1 pad.ICT@112.55,131.7 RC59.1 UC635.10 | length 12
  Top Layer w0.5: UC635.10@111.6,129.98 113.27,129.98 113.75,129.5 v1(113.75,128.75)
  Bottom Layer w0.5: pad.ICT@112.338,131.488 cw(c111.826,130.976) 112.55,130.976 cw(c113.274,130.976) pad.ICT@112.762,131.488 ; CC34.1@112.373,129.823 cw(c111.826,129.276) 112.6,129.276 ; CC34.1@112.373,130.177 ccw(c111.946,130.604) 112.55,130.604 ccw(c113.154,130.604) CC34.1@112.727,130.177 ; RC59.1@112.459,128.691 ccw(c112.117,129.033) 112.6,129.033 ccw(c113.083,129.033) RC59.1@112.741,128.691 ; CC34.1@112.55,130 pad.ICT@112.55,131.7 ; RC59.1@112.6,128.25 CC34.1@112.6,129.95 ; RC59.1@112.62,128.75 v1(113.75,128.75) ; RC59.1@112.741,128.409 cw(c113.566,127.584) v1@113.566,128.75
NetCC35_1: CC35.1 pad.ICT@112.3,144.95 RC63.1 UC632.10 | length 10.9
  Top Layer w0.5: UC632.10@111.6,142.98 v1(113.48,142.98)
  Bottom Layer w0.5: pad.ICT@112.088,144.738 cw(c111.576,144.226) 112.3,144.226 cw(c113.024,144.226) pad.ICT@112.512,144.738 ; CC35.1@112.123,143.073 cw(c111.696,142.646) 112.3,142.646 cw(c112.904,142.646) CC35.1@112.477,143.073 ; CC35.1@112.123,143.427 ccw(c111.696,143.854) 112.3,143.854 ccw(c112.904,143.854) CC35.1@112.477,143.427 ; RC63.1@112.3,141.8 CC35.1@112.3,143.25 pad.ICT@112.3,144.95 ; 112.3,142.404 ccw(c112.954,142.404) RC63.1@112.491,141.941 ; CC35.1@112.32,142.98 v1(113.48,142.98) cw(c113.48,144.329) CC35.1@112.485,143.419
NetCC36_1: CC36.1 pad.ICT@115,127.5 RC51.2 RC61.2 UC635.12 | length 18.4
  Top Layer w0.5: UC635.12@111.6,132.52 v1@113.75,132.52 ; 113.34,132.52 cw(c113.34,132.09) v1@113.644,132.394
  Bottom Layer w0.5: pad.ICT@114.788,127.712 ccw(c114.276,128.224) 115,128.224 ccw(c115.724,128.224) pad.ICT@115.212,127.712 ; pad.ICT@115,127.5 115,128.85 RC51.2@115.15,129 RC61.2@115.15,132 ; 115,128.105 cw(c115.995,128.105) RC51.2@115.291,128.809 ; RC51.2@115.009,129.191 ccw(c114.667,129.533) 115.15,129.533 ccw(c115.633,129.533) RC51.2@115.291,129.191 ; RC61.2@115.009,131.809 cw(c114.667,131.467) 115.15,131.467 cw(c115.633,131.467) RC61.2@115.291,131.809 ; 115.15,129.776 cw(c115.924,129.776) CC36.1@115.377,130.323 ; 115.15,131.224 ccw(c115.924,131.224) CC36.1@115.377,130.677 ; RC61.2@115.15,131.95 RC61.2@115.15,132 ; v1(113.75,132.5) cw(c113.75,130.867) 114.997,131.921 ccw(c113.75,130.867) v1(113.75,132.5) ; v1(113.75,132.5) 114.65,132.5 ; v1(113.75,132.5) 114.65,132.5 ; 114.65,132.5 RC61.2@115.15,132 ; RC61.2@114.827,132.5 cw(c114.827,131.777) 115.379,132.244 ccw(c114.827,131.777) RC61.2@114.827,132.5
NetCC37_1: CC37.1 pad.ICT@115.15,140.4 RC53.2 RC64.2 UC632.12 | length 15.5
  Top Layer w0.5: UC632.12@111.6,145.52 113.48,145.52 v1(113.75,145.25) ; 112.736,145.52 cw(c112.736,144.236) v1@113.644,145.144
  Bottom Layer w0.5: v1(113.75,145.25) 114.95,145.25 115.15,145.05 RC64.2@115.15,143.5 ; v1@113.993,145.25 cw(c113.993,143.793) CC37.1@115.023,144.823 ; pad.ICT@114.938,140.612 ccw(c114.426,141.124) 115.15,141.124 ccw(c115.874,141.124) pad.ICT@115.362,140.612 ; RC53.2@115.009,141.809 cw(c114.667,141.467) 115.15,141.467 cw(c115.633,141.467) RC53.2@115.291,141.809 ; RC53.2@115.009,142.191 ccw(c114.667,142.533) 115.15,142.533 ccw(c115.633,142.533) RC53.2@115.291,142.191 ; RC64.2@115.009,143.309 cw(c114.667,142.967) 115.15,142.967 cw(c115.633,142.967) RC64.2@115.291,143.309 ; RC64.2@115.009,143.691 ccw(c114.667,144.033) 115.15,144.033 ccw(c115.633,144.033) RC64.2@115.291,143.691 ; pad.ICT@115.15,140.4 RC53.2@115.15,142 RC64.2@115.15,143.5 ; RC64.2@115.15,143.35 RC64.2@115.15,143.5 ; 115.15,144.276 cw(c115.924,144.276) CC37.1@115.377,144.823
NetCC38_2: CC38.2 pad.ICT@84,116.25 RC66.1 RC67.1 UC629.3 | length 13.3
  Top Layer w0.5: v1(82.77,120.27) UC629.3@84.4,120.27
  Bottom Layer w0.5: RC67.1@83.63,120.27 v1(82.77,120.27) ccw(c82.77,121.398) RC67.1@83.73,120.805 ; RC67.1@83.667,120.27 ccw(c83.667,120.844) RC67.1@84.155,120.542 ; RC66.1@83.759,119.059 cw(c83.417,118.717) 83.9,118.717 cw(c84.383,118.717) RC66.1@84.041,119.059 ; RC66.1@83.759,119.441 ccw(c83.417,119.783) 83.9,119.783 ccw(c84.383,119.783) RC66.1@84.041,119.441 ; RC67.1@83.759,120.559 cw(c83.417,120.217) 83.9,120.217 cw(c84.383,120.217) RC67.1@84.041,120.559 ; CC38.2@83.773,117.573 cw(c83.226,117.026) 84,117.026 ; pad.ICT@83.788,116.462 ccw(c83.276,116.974) 84,116.974 ccw(c84.724,116.974) pad.ICT@84.212,116.462 ; CC38.2@83.9,117.8 RC66.1@83.9,119.25 RC67.1@83.9,120.75 ; 83.9,118.474 ccw(c84.674,118.474) CC38.2@84.127,117.927 ; CC38.2@83.95,117.75 84,117.7 pad.ICT@84,116.25
NetCC39_2: CC39.2 pad.ICT@18,152.5 RC69.1 RC71.2 UC624.6 | length 19.4
  Top Layer w0.5: CC39.2@16.712,152.175 cw(c17.384,152.387) 16.886,152.886 ; RC71.2@16.759,150.941 ccw(c16.417,151.283) 16.9,151.283 ccw(c17.383,151.283) RC71.2@17.041,150.941 ; CC39.2@16.773,152.427 ccw(c16.346,152.854) 16.95,152.854 ccw(c17.554,152.854) CC39.2@17.127,152.427 ; RC71.2@16.9,150.75 CC39.2@16.9,152.2 ; 16.9,151.526 cw(c17.674,151.526) CC39.2@17.127,152.073 ; CC39.2@16.95,152.25 16.95,152.95 v1(17.468,153.468) ; CC39.2@17.188,152.325 cw(c18.27,152.666) v1(17.468,153.468) ; 18.188,154.188 ccw(c17.676,154.7) RC69.1@18.4,154.7 ; RC69.1@18.507,154.507 v1(17.468,153.468) ; RC69.1@18.559,154.503 ccw(c18.677,155.359) 19.288,154.748 ; RC69.1@18.6,154.507 RC69.1@18.6,154.75 19.29,154.75 20,155.46 ; RC69.1@18.627,154.998 ccw(c18.849,156.611) 20,155.46 ; RC69.1@18.741,154.609 cw(c19.083,154.267) 19.083,154.75 cw(c19.083,155.233) RC69.1@18.741,154.891 ; UC624.6@21.4,155.46 20,155.46
  Bottom Layer w0.5: 17.468,152.886 ccw(c18.059,152.886) pad.ICT@17.97,152.302 ; v1@17.611,153.422 ccw(c18.274,153.21) pad.ICT@17.782,152.718 ; pad.ICT@18,152.5 17.468,153.032 v1(17.468,153.468) ccw(c18.148,153.468) pad.ICT@18.045,152.797
NetCC40_1: CC40.1 pad.ICT@20.75,160.25 RC74.1 RC76.1 UC624.3 | length 16.6
  Top Layer w0.5: CC40.1@18.373,161.323 cw(c17.826,160.776) 18.6,160.776 ; RC74.1@18.459,160.191 ccw(c18.117,160.533) 18.6,160.533 ccw(c19.083,160.533) RC74.1@18.741,160.191 ; CC40.1@18.6,161.45 18.6,159.75 v1(19.75,159.75) 20.23,159.27 UC624.3@21.4,159.27 ; RC74.1@18.741,160.091 ccw(c19.566,160.916) v1@19.566,159.75 ; v1@19.935,159.565 ccw(c20.533,160.163) UC624.3@20.596,159.32
  Bottom Layer w0.25: RC76.1@18.6,160 18.85,159.75 v1(19.75,159.75) ; RC76.1@18.657,159.999 ccw(c19.202,160.472) 19.202,159.75 ; RC76.1@18.846,160.163 ccw(c19.75,160.947) v1(19.75,159.75) ; v1@19.556,159.556 ccw(c19.086,159.086) 19.086,159.75 ccw(c19.086,160.414) v1@19.556,159.944 ; v1@19.944,159.556 cw(c20.414,159.086) 20.414,159.75 cw(c20.414,160.414) v1@19.944,159.944 ; v1@20.02,159.75 ccw(c20.02,160.307) pad.ICT@20.576,160.264 ; 20.291,159.75 ccw(c20.291,160.286) pad.ICT@20.825,160.244 ; pad.ICT@20.326,160.283 cw(c19.75,160.328) v1(19.75,159.75) ; pad.ICT@21,160.25 20.5,159.75 v1(19.75,159.75)
NetCC41_1: CC41.1 pad.ICT@77.65,120.35 RC70.2 RC75.2 UC629.1 | length 18.9
  Top Layer w0.25: RC70.2@79.75,117.5 RC70.2@79.9,117.5 ; RC75.2@79.9,121.55 RC75.2@79.95,121.55
  Top Layer w0.5: 79,117.95 ccw(c79.594,118.544) RC70.2@79.841,117.741 ; RC75.2@79.473,121.073 cw(c79.9,120.646) RC75.2@79.9,121.25 ; RC70.2@79.75,117.5 79.45,117.5 78.75,118.2 v1(78.75,120.35) RC75.2@79.9,121.5 ; RC75.2@79.759,121.691 ccw(c79.296,122.154) 79.95,122.154 ; CC41.1@79.773,122.823 cw(c79.346,122.396) 79.95,122.396 cw(c80.554,122.396) CC41.1@80.127,122.823 ; CC41.1@79.773,123.177 ccw(c79.346,123.604) 79.95,123.604 ccw(c80.554,123.604) CC41.1@80.127,123.177 ; RC75.2@79.95,121.55 CC41.1@79.95,123 79.95,123.95 80.25,124.25 82.25,124.25 83.69,122.81 UC629.1@84.4,122.81
  Bottom Layer w0.5: pad.ICT@77.65,120.35 v1(78.75,120.35) ; pad.ICT@77.862,120.138 cw(c78.374,119.626) 78.374,120.35 cw(c78.374,121.074) pad.ICT@77.862,120.562
NetCC41_2: CC41.2 pad.ICT@81.5,121.75 RC73.2 RC75.1 UC629.2 | length 11.6
  Top Layer w0.5: CC41.2@81.373,122.823 cw(c80.826,122.276) 81.6,122.276 ; RC75.1@81.459,121.691 ccw(c81.117,122.033) 81.6,122.033 ccw(c82.083,122.033) 81.741,121.691 ccw(c82.107,122.057) 82.107,121.54 ; RC75.1@81.6,121.5 CC41.2@81.6,122.95 ; RC75.1@81.64,121.54 v1(82.75,121.54) UC629.2@84.4,121.54 ; RC75.1@81.741,121.409 cw(c82.059,121.091) 82.059,121.54
  Bottom Layer w0.5: pad.ICT@81.5,121.75 81.71,121.54 v1(82.75,121.54) 83.46,122.25 RC73.2@83.9,122.25 ; pad.ICT@81.712,121.962 ccw(c82.731,122.981) v1@82.731,121.54 ; v1@82.722,121.512 cw(c83.9,120.334) RC73.2@83.9,122
NetCC43_1: CC43.1 pad.ICT@83.75,135.5 RC84.1 RC91.2 TP13.1 UC633.1 | length 28.3
  Top Layer w0.5: RC84.1@79.759,135.941 ccw(c79.417,136.283) 79.9,136.283 ccw(c80.383,136.283) RC84.1@80.041,135.941 ; RC84.1@79.9,135.75 79.9,138.15 80.5,138.75 82.75,138.75 TP13.1@84.25,137.25 UC633.1@84.25,135 ; 79.9,136.526 cw(c80.674,136.526) CC43.1@80.127,137.073 ; 79.9,137.974 ccw(c80.674,137.974) CC43.1@80.127,137.427 ; TP13.1@83.7,137.25 ccw(c82.372,137.25) 83.311,138.189 ccw(c84.25,139.128) TP13.1@84.25,137.8 ; TP13.1@83.861,136.861 cw(c82.922,135.922) 84.25,135.922 cw(c85.578,135.922) TP13.1@84.639,136.861 ; 84.25,135.543 ccw(c84.883,135.543) UC633.1@84.435,135.095
  Bottom Layer w0.5: RC91.2@81.6,137.25 81.85,137.5 84.25,137.5 TP13.1@84.25,136.75 ; RC91.2@81.741,137.159 cw(c82.566,136.334) 82.566,137.5 ; 82.319,137.5 cw(c82.319,135.319) TP13.1@83.861,136.861 ; pad.ICT@83.538,135.712 ccw(c83.026,136.224) 83.75,136.224 ; pad.ICT@83.75,135.5 TP13.1@83.75,137.25 ; 83.75,136.224 ccw(c84.474,136.224) pad.ICT@83.962,135.712 ; 83.75,136.297 cw(c84.801,136.297) TP13.1@84.275,137.207 ; pad.ICT@83.75,135.43 cw(c85.302,135.43) TP13.1@84.525,136.774
NetCC43_2: CC43.2 pad.ICT@76.725,134.775 RC83.2 RC84.2 UC633.2 | length 22.9
  Top Layer w0.5: RC84.2@81.309,135.872 cw(c82.111,135.673) 82.111,136.5 ; CC43.2@81.373,137.073 cw(c80.946,136.646) 81.55,136.646 cw(c82.154,136.646) CC43.2@81.727,137.073 ; RC84.2@81.55,135.8 CC43.2@81.55,137.25 ; 81.55,136.404 ccw(c82.204,136.404) RC84.2@81.741,135.941 ; 81.55,136.5 v1(82.75,136.5) ccw(c82.75,135.515) RC84.2@81.794,135.752 ; RC84.2@81.6,135.75 81.6,135.4 83.21,133.79 UC633.2@84.4,133.79 ; RC84.2@81.8,135.7 ccw(c83.007,135.7) 82.154,134.846 ; 82.849,134.151 ccw(c83.6,134.902) UC633.2@83.6,133.84
  Bottom Layer w0.25: pad.ICT@76.725,134.775 80.625,134.775 RC83.2@81.6,135.75 ; pad.ICT@77.026,134.474 cw(c77.751,133.749) 77.751,134.775 cw(c77.751,135.801) pad.ICT@77.026,135.076 ; 80.96,135.11 cw(c81.6,134.47) RC83.2@81.6,135.375 ; 81.081,135.231 ccw(c80.611,135.7) RC83.2@81.275,135.7
  Bottom Layer w0.5: RC83.2@81.6,135.75 82,135.75 v1(82.75,136.5) ; RC83.2@81.6,136 ccw(c81.6,137.569) v1@82.71,136.46
NetCC44_1: CC44.1 pad.ICT@23.25,161.25 RC87.1 RC88.2 UC624.2 | length 18.8
  Top Layer w0.5: CC44.1@17,163.7 18.55,163.7 19.75,162.5 v1(19.75,161.25) 20.46,160.54 UC624.2@21.4,160.54 ; CC44.1@17.177,163.523 cw(c17.604,163.096) 17.604,163.7 cw(c17.604,164.304) CC44.1@17.177,163.877 ; 17.846,163.7 cw(c17.846,163.046) RC88.2@18.309,163.509 ; RC88.2@18.55,163.45 cw(c18.55,162.846) RC88.2@18.977,163.273 ; 20.276,160.724 ccw(c20.6,161.049) UC624.2@20.6,160.59
  Bottom Layer w0.25: RC87.1@18.6,161.5 18.85,161.25 v1(19.75,161.25) ; RC87.1@18.657,161.499 ccw(c19.202,161.972) 19.202,161.25 ; RC87.1@18.846,161.663 ccw(c19.75,162.447) v1(19.75,161.25) ; v1@19.556,161.056 ccw(c19.086,160.586) 19.086,161.25 ccw(c19.086,161.914) v1@19.556,161.444 ; v1@19.944,161.056 cw(c20.414,160.586) 20.414,161.25 cw(c20.414,161.914) v1@19.944,161.444 ; pad.ICT@22.949,160.949 ccw(c22.224,160.224) 22.224,161.25 ccw(c22.224,162.276) pad.ICT@22.949,161.551 ; pad.ICT@23.25,161.25 v1(19.75,161.25)
NetCC45_2: CC45.2 DC10.2 pad.ICT@68.5,149.75 RC532.2 TP18.1 UC50.4 UC636.1 UC636.14 | length 41.2
  Top Layer w0.25: DC10.2@55.843,144.807 ccw(c54.862,145.788) 56.25,145.788 ccw(c57.638,145.788) DC10.2@56.657,144.807 ; DC10.2@56.02,144.63 ccw(c55.465,145.185) 56.25,145.185 ccw(c57.035,145.185) DC10.2@56.48,144.63 ; DC10.2@56.25,144.3 56.25,146 58.06,147.81 UC636.1@63.15,147.81 ; UC636.1@62.226,147.686 ccw(c61.928,147.388) 61.928,147.81 ccw(c61.928,148.232) UC636.1@62.226,147.934
  Top Layer w0.5: UC636.1@63.15,147.81 66.25,147.81 ; 65.81,147.81 66.25,148.25 ; TP18.1@65.861,149.361 cw(c64.922,148.422) 66.25,148.422 cw(c67.578,148.422) TP18.1@66.639,149.361 ; TP18.1@65.861,150.139 ccw(c64.922,151.078) 66.25,151.078 ccw(c67.578,151.078) TP18.1@66.639,150.139 ; 66.25,150.976 cw(c67.074,150.976) RC532.2@66.491,151.559 ; 66.25,152.524 ccw(c67.074,152.524) RC532.2@66.491,151.941 ; 66.25,152.526 cw(c67.024,152.526) CC45.2@66.477,153.073 ; CC45.2@66.25,153 66.25,148.25 ; CC45.2@66.3,153 66.3,153.55 67.75,155 UC50.4@68.65,155 ; CC45.2@66.55,153.25 cw(c67.878,153.25) 66.939,154.189 ; 66.69,147.81 66.25,148.25 ; UC636.14@68.35,147.81 66.25,147.81 ; 66.25,147.81 66.25,148.25
  Bottom Layer w0.5: TP18.1@66.25,149.75 pad.ICT@68.5,149.75 ; TP18.1@66.639,149.361 cw(c67.578,148.422) 67.578,149.75 cw(c67.578,151.078) TP18.1@66.639,150.139 ; pad.ICT@68.288,149.538 ccw(c67.776,149.026) 67.776,149.75 ccw(c67.776,150.474) pad.ICT@68.288,149.962
NetCC49_2: CC49.2 pad.ICT@101.75,210.25 RC103.1 RC104.2 UC625.3 | length 18.4
  Top Layer w0.5: v1(103.385,211.865) UC625.3@104.9,211.865
  Bottom Layer w0.5: pad.ICT@101.538,210.462 ccw(c101.026,210.974) 101.75,210.974 ccw(c102.474,210.974) pad.ICT@101.962,210.462 ; pad.ICT@101.551,210.23 cw(c102.647,210.339) 101.868,211.118 ; pad.ICT@101.75,210.25 101.75,211 102.615,211.865 ; pad.ICT@102.049,210.28 cw(c104.006,210.474) 102.615,211.865 ; v1@103.385,211.715 cw(c103.385,210.025) CC49.2@104.58,211.22 ; v1@103.447,211.728 cw(c103.729,211.109) 104.21,211.59 ; CC49.2@104.5,211.05 ccw(c103.896,211.05) 104.323,211.477 ccw(c104.75,211.904) CC49.2@104.75,211.3 ; CC49.2@104.927,210.873 cw(c105.354,210.446) 105.354,211.05 cw(c105.354,211.654) CC49.2@104.927,211.227 ; 105.596,211.05 ccw(c105.596,211.704) RC103.1@106.059,211.241 ; RC103.1@106.441,211.241 ccw(c106.904,211.704) 106.904,211.05 ; 107.096,211.05 ccw(c107.096,211.704) RC104.2@107.559,211.241 ; RC104.2@107.7,211.05 CC49.2@104.75,211.05 103.935,211.865 v1(103.385,211.865) 102.615,211.865
NetCC52_1: CC52.1 DC6.3 pad.ICT@77.75,128 RC94.1 RC107.1 RC138.2 UC633.7 | length 33.9
  Top Layer w0.25: RC94.1@79.67,133.27 ccw(c79.115,132.715) 79.115,133.5 ccw(c79.115,134.285) RC94.1@79.67,133.73 ; CC52.1@79.685,129.235 ccw(c79.045,128.595) 79.045,129.5 ccw(c79.045,130.405) CC52.1@79.685,129.765 ; RC94.1@79.9,133.5 78.75,133.5 78.275,133.025 78.275,129.975 78.75,129.5 CC52.1@79.95,129.5
  Top Layer w0.5: RC107.1@79.759,127.559 cw(c79.296,127.096) 79.95,127.096 ; RC107.1@79.759,127.941 ccw(c79.296,128.404) 79.95,128.404 ; CC52.1@79.773,129.323 cw(c79.346,128.896) 79.95,128.896 cw(c80.554,128.896) CC52.1@80.127,129.323 ; CC52.1@79.95,129.5 79.95,126.8 80.25,126.5 82.25,126.5 v1@82.94,127.19 ; 82.507,126.757 ccw(c81.824,127.44) v1@82.79,127.44 ; v1@82.815,127.065 cw(c83.6,126.279) UC633.7@83.6,127.39 ; v1@82.985,127.235 cw(c83.42,126.801) UC633.7@83.586,127.392 ; UC633.7@84.4,127.44 v1@83.19,127.44 ; v1@82.94,127.19 v1@83.19,127.44 ; v1@82.94,127.19 v1(82.94,127.44) v1@83.19,127.44
  Bottom Layer w0.25: pad.ICT@77.75,128 78.75,129 81,129 81.677,128.323 DC6.3@81.677,127.5 ; pad.ICT@77.75,128.425 ccw(c77.75,129.451) 78.476,128.726 ccw(c79.201,128) pad.ICT@78.175,128 ; DC6.3@81.553,127.624 ccw(c81.255,127.922) 81.677,127.922 ccw(c82.1,127.922) DC6.3@81.801,127.624
  Bottom Layer w0.5: DC6.3@81.677,127.5 RC138.2@83.9,127.5 ; 82.433,127.5 cw(c82.433,126.933) v1@82.834,127.334 ; v1@82.934,127.5 cw(c82.934,126.334) RC138.2@83.759,127.159 ; v1@83.046,127.334 cw(c83.447,126.933) 83.447,127.5 ; RC138.2@83.65,127.5 RC138.2@83.9,127.25
NetCC52_2: CC52.2 pad.ICT@75.25,128 RC106.1 RC107.2 UC633.6 | length 19
  Top Layer w0.5: CC52.2@81.373,129.323 cw(c80.826,128.776) 81.6,128.776 ; RC107.2@81.459,127.941 ccw(c81.117,128.283) 81.6,128.283 ccw(c82.083,128.283) RC107.2@81.741,127.941 ; RC107.2@81.6,127.75 CC52.2@81.6,129.45 ; 81.64,128.71 UC633.6@84.4,128.71
  Bottom Layer w0.25: pad.ICT@75.25,128 76.7,129.45 81.186,129.45 81.926,128.71 v1(82.75,128.71) ; pad.ICT@75.25,128.425 ccw(c75.25,129.451) 75.976,128.726 ccw(c76.701,128) pad.ICT@75.675,128 ; v1@82.556,128.516 ccw(c82.086,128.046) 82.086,128.71 ccw(c82.086,129.374) v1@82.556,128.904
  Bottom Layer w0.5: v1(82.75,128.71) RC106.1@84.11,128.71 ; 83.393,128.71 cw(c83.393,128.193) RC106.1@83.759,128.559 ; 83.441,128.71 ccw(c83.441,129.159) RC106.1@83.759,128.841
NetCC53_1: CC53.1 pad.ICT@78,132.5 RC94.2 RC100.1 UC633.3 | length 18.8
  Top Layer w0.5: RC94.2@81.6,133.25 cw(c81.6,132.043) 82.454,132.896 ; RC94.2@81.6,133.75 v1(82.83,132.52) UC633.3@84.4,132.52
  Bottom Layer w0.25: pad.ICT@77.699,132.801 ccw(c76.974,133.526) 78,133.526 ccw(c79.026,133.526) pad.ICT@78.301,132.801 ; pad.ICT@78,132.5 78,133.75 78.575,134.325 80.775,134.325 RC100.1@81.6,133.5 ; 80.96,134.14 ccw(c81.6,134.78) RC100.1@81.6,133.875 ; 81.081,134.019 cw(c80.611,133.55) RC100.1@81.275,133.55
  Bottom Layer w0.5: CC53.1@81.329,132.117 cw(c81.999,131.762) 81.999,132.52 ; CC53.1@81.373,132.177 ccw(c80.946,132.604) 81.55,132.604 ccw(c82.154,132.604) CC53.1@81.727,132.177 ; CC53.1@81.55,132 RC100.1@81.55,133.45 ; 81.55,132.846 cw(c82.204,132.846) RC100.1@81.741,133.309 ; 81.57,132.52 v1(82.83,132.52) ccw(c82.83,131.321) CC53.1@81.771,131.883
NetCC54_1: CC54.1 pad.ICT@75.25,130.75 RC99.1 RC101.1 UC633.5 | length 21.4
  Top Layer w0.5: v1(82.77,129.98) UC633.5@84.4,129.98
  Bottom Layer w0.25: pad.ICT@75.25,130.325 cw(c75.25,129.299) 75.976,130.024 cw(c76.701,130.75) pad.ICT@75.675,130.75 ; pad.ICT@75.25,130.75 76.02,129.98 79.5,129.98 ; 78.582,129.98 v1(82.77,129.98) ; v1@82.576,129.786 ccw(c82.106,129.316) 82.106,129.98 ccw(c82.106,130.644) v1@82.576,130.174
  Bottom Layer w0.5: v1(82.77,129.98) RC99.1@83.88,129.98 ; v1@82.886,129.98 ccw(c82.886,131.214) RC99.1@83.759,130.341 ; RC99.1@83.63,129.98 RC99.1@83.9,130.25 CC54.1@83.9,133.25 ; RC99.1@83.759,130.441 ccw(c83.417,130.783) 83.9,130.783 ccw(c84.383,130.783) RC99.1@84.041,130.441 ; RC101.1@83.759,131.559 cw(c83.417,131.217) 83.9,131.217 cw(c84.383,131.217) RC101.1@84.041,131.559 ; RC101.1@83.759,131.941 ccw(c83.417,132.283) 83.9,132.283 ccw(c84.383,132.283) RC101.1@84.041,131.941 ; 83.9,132.526 cw(c84.674,132.526) CC54.1@84.127,133.073